# EAGLE board CT_schematic (EAGLE 7.6.0)

Size 100 x 80 mm. Coordinates in mm from the lower left corner, seen from the top.
Outline: 0,0 100,0 100,80 0,80 0,0
Copper layers (1*16): Top 0.035mm / dielectric 1.5mm / Bottom 0.035mm
Design rules "default": minimum track width 10mil, minimum drill 24mil, track to track 8mil, track to pad 8mil, pad to pad 8mil, via to via 8mil, smd to smd 8mil, copper to edge 40mil, drill to drill 8mil, minimum pad ring 10mil, minimum via ring 8mil, stop-mask expansion 4mil, vias tented up to drill 0mil, thermal gap 10mil

## Footprints (pad centres in the part's own frame; a part is rotated, then mirrored left to right if it is on the bottom)
C0603 = smd 0.8 x 0.8: 1 -0.762,0; 2 0.762,0
C0402 = smd 0.5 x 0.5: 1 -0.508,0; 2 0.508,0
C1210 = smd 1.2 x 2.5: 1 -1.524,0; 2 1.524,0
C0805 = smd 1.2 x 1.3: 1 -1.016,0; 2 1.016,0
C1206 = smd 1.3 x 1.6: 1 -1.524,0; 2 1.524,0
L0603 = smd 0.8 x 0.8: 1 -0.762,0; 2 0.762,0
DR1040 = smd 1.6 x 3.2: 1 -4.458,0; 2 4.458,0
R0603 = smd 0.8 x 0.8: 1 -0.762,0; 2 0.762,0
LQFP100 = smd 0.3 x 1.2: 1 -6,-7.75; 2 -5.5,-7.75; 3 -5,-7.75; 4 -4.5,-7.75; 5 -4,-7.75; 6 -3.5,-7.75; 7 -3,-7.75; 8 -2.5,-7.75; 9 -2,-7.75; 10 -1.5,-7.75; 11 -1,-7.75; 12 -0.5,-7.75; 13 0,-7.75; 14 0.5,-7.75; 15 1,-7.75; 16 1.5,-7.75; 17 2,-7.75; 18 2.5,-7.75; 19 3,-7.75; 20 3.5,-7.75; 21 4,-7.75; 22 4.5,-7.75; 23 5,-7.75; 24 5.5,-7.75; 25 6,-7.75; 51 6,7.75; 52 5.5,7.75; 53 5,7.75; 54 4.5,7.75; 55 4,7.75; 56 3.5,7.75; 57 3,7.75; 58 2.5,7.75; 59 2,7.75; 60 1.5,7.75; 61 1,7.75; 62 0.5,7.75; 63 0,7.75; 64 -0.5,7.75; 65 -1,7.75; 66 -1.5,7.75; 67 -2,7.75; 68 -2.5,7.75; 69 -3,7.75; 70 -3.5,7.75; 71 -4,7.75; 72 -4.5,7.75; 73 -5,7.75; 74 -5.5,7.75; 75 -6,7.75 | smd 1.2 x 0.3: 26 7.75,-6; 27 7.75,-5.5; 28 7.75,-5; 29 7.75,-4.5; 30 7.75,-4; 31 7.75,-3.5; 32 7.75,-3; 33 7.75,-2.5; 34 7.75,-2; 35 7.75,-1.5; 36 7.75,-1; 37 7.75,-0.5; 38 7.75,0; 39 7.75,0.5; 40 7.75,1; 41 7.75,1.5; 42 7.75,2; 43 7.75,2.5; 44 7.75,3; 45 7.75,3.5; 46 7.75,4; 47 7.75,4.5; 48 7.75,5; 49 7.75,5.5; 50 7.75,6; 76 -7.75,6; 77 -7.75,5.5; 78 -7.75,5; 79 -7.75,4.5; 80 -7.75,4; 81 -7.75,3.5; 82 -7.75,3; 83 -7.75,2.5; 84 -7.75,2; 85 -7.75,1.5; 86 -7.75,1; 87 -7.75,0.5; 88 -7.75,0; 89 -7.75,-0.5; 90 -7.75,-1; 91 -7.75,-1.5; 92 -7.75,-2; 93 -7.75,-2.5; 94 -7.75,-3; 95 -7.75,-3.5; 96 -7.75,-4; 97 -7.75,-4.5; 98 -7.75,-5; 99 -7.75,-5.5; 100 -7.75,-6
SAMTEC_FTSH-105-01-L-DV-K = smd 0.762 x 2.794: 1 -2.54,-2.032; 2 -2.54,2.032; 3 -1.27,-2.032; 4 -1.27,2.032; 5 0,-2.032; 6 0,2.032; 7 1.27,-2.032; 8 1.27,2.032; 9 2.54,-2.032; 10 2.54,2.032
TDFN-8/6MM = smd 0.3 x 0.75: 1 0,0; 2 0.5,0; 3 1,0; 4 1.5,0; 5 1.5,3; 6 1,3; 7 0.5,3; 8 0,3
FCI_10118193-0001LF = smd 0.4 x 1.35: 1 -1.3,2.675; 2 -0.65,2.675; 3 0,2.675; 4 0.65,2.675; 5 1.3,2.675 | smd 1.6 x 1.4: 6 -3.2,2.45; 7 3.2,2.45 | smd 1.9 x 1.9: 8 -1.2,0; 9 1.2,0 | hole 0.5: -3.3,0; 3.3,0
SOT143B = smd 1 x 0.7: 1 -0.75,-1 | smd 0.6 x 0.7: 2 0.95,-1; 3 0.95,1; 4 -0.95,1
QFN-28 = smd 0.813 x 0.305: 1 -2.451,1.5; 2 -2.451,1; 3 -2.451,0.5; 4 -2.451,0; 5 -2.451,-0.5; 6 -2.451,-1; 7 -2.451,-1.5; 15 2.451,-1.5; 16 2.451,-1; 17 2.451,-0.5; 18 2.451,0; 19 2.451,0.5; 20 2.451,1; 21 2.451,1.5 | smd 0.305 x 0.813: 8 -1.5,-2.451; 9 -1,-2.451; 10 -0.5,-2.451; 11 0,-2.451; 12 0.5,-2.451; 13 1,-2.451; 14 1.5,-2.451; 22 1.5,2.451; 23 1,2.451; 24 0.5,2.451; 25 0,2.451; 26 -0.5,2.451; 27 -1,2.451; 28 -1.5,2.451 | smd 3.607 x 3.607: 29 0,0
SJ-43515TS-SMT-TR = smd 2.2 x 3: 1 0.6,-7.4; 4 3.4,-7.4 | smd 3 x 3: 2 12.8,-7.4; 5 17,-3 | smd 2 x 3: 3 5.3,0; 6 2.5,0 | drill 1.8: P$7 4.5,-3.69; P$8 11.54,-3.69
ABS07-32.768KHZ-7-T = smd 1.1 x 2.4: 1 -2.5,0; 2 0,0
ABLS-25.000MHZ-B2F-T = smd 5.6 x 2.8: 1 -3.81,0; 2 5.69,0
ASFL1 = smd 1.7 x 1.5: 1 -1.27,-1.1; 2 1.27,-1.1; 3 1.27,1.1; 4 -1.27,1.1
TSOT-23-5 = smd 1.3 x 0.62: 1 -1.31,0.95; 2 -1.31,0; 3 -1.31,-0.95; 4 1.31,-0.95; 5 1.31,0.95
DFN8_2X3MC = smd 0.813 x 0.305: 1 -1.398,0.75; 2 -1.398,0.25; 3 -1.398,-0.25; 4 -1.398,-0.75; 5 1.398,-0.75; 6 1.398,-0.25; 7 1.398,0.25; 8 1.398,0.75 | smd 1.753 x 1.549: 9 0,0
JST-2-SMD = smd 1 x 4.6: 1 -1,-3.7; 2 1,-3.7 | smd 1.6 x 3.4: NC1 -3.4,1.5; NC2 3.4,1.5
SON-6 = smd 0.55 x 0.3: 1 -0.355,0.5 | smd 0.52 x 0.3: 2 -0.37,0; 3 -0.37,-0.5; 4 0.37,-0.5; 5 0.37,0; 6 0.37,0.5
SW_4-1437565-2 = smd 1.4 x 2.1: 1 -2.23,4.55; 2 -2.23,-4.55; 3 2.23,4.55; 4 2.23,-4.55
LGM67K-G1J2-24-Z = smd 0.8 x 1.4: A -2,0; C 0,0
NC7SZ125M5X = smd 1.3 x 0.7: 1 -1.3,0.95; 2 -1.3,0; 3 -1.3,-0.95; 4 1.3,-0.95; 5 1.3,0.95

## Placement (x,y rotation side)
C1  1e-07  [C0603]  -15.24,74.93 0 top  (outside the outline)
C2  1e-07  [C0603]  -19.05,74.93 0 top  (outside the outline)
C3  1e-07  [C0603]  -22.86,74.93 0 top  (outside the outline)
C4  1e-07  [C0603]  -26.67,74.93 0 top  (outside the outline)
C5  1e-07  [C0603]  -30.48,74.93 0 top  (outside the outline)
C6  4.7e-06  [C0603]  -74.93,69.85 0 top  (outside the outline)
C7  1e-07  [C0603]  -34.29,74.93 0 top  (outside the outline)
C8  1e-08  [C0603]  -38.1,74.93 0 top  (outside the outline)
C9  1e-06  [C0603]  -41.91,74.93 0 top  (outside the outline)
C10  1e-07  [C0603]  -45.72,74.93 0 top  (outside the outline)
C11  1e-11  [C0402]  -19.05,80.01 0 top  (outside the outline)
C12  1e-11  [C0402]  -22.86,80.01 0 top  (outside the outline)
C13  1e-11  [C0402]  -26.67,80.01 0 top  (outside the outline)
C14  1e-11  [C0402]  -30.48,80.01 0 top  (outside the outline)
C15  1e-07  [C0402]  -34.29,80.01 0 top  (outside the outline)
C16  1e-08  [C0402]  -38.1,80.01 0 top  (outside the outline)
C17  2.2e-05  [C1210]  -57.15,57.15 0 top  (outside the outline)
C18  2.2e-05  [C1210]  -63.5,57.15 0 top  (outside the outline)
C19  1e-09  [C0402]  -41.91,80.01 0 top  (outside the outline)
C20  1e-09  [C0402]  -45.72,80.01 0 top  (outside the outline)
C21  1e-07  [C0402]  -49.53,80.01 0 top  (outside the outline)
C22  1e-07  [C0402]  -53.34,80.01 0 top  (outside the outline)
C23  1e-07  [C0402]  -57.15,80.01 0 top  (outside the outline)
C24  1e-07  [C0402]  -60.96,80.01 0 top  (outside the outline)
C25  1e-07  [C0402]  -64.77,80.01 0 top  (outside the outline)
C26  1e-05  [C0805]  -27.94,63.5 0 top  (outside the outline)
C27  1e-05  [C0805]  -33.02,63.5 0 top  (outside the outline)
C28  1e-05  [C0805]  -38.1,63.5 0 top  (outside the outline)
C29  1e-05  [C0805]  -43.18,63.5 0 top  (outside the outline)
C30  1e-05  [C0805]  -48.26,63.5 0 top  (outside the outline)
C31  1e-08  [C0402]  -68.58,80.01 0 top  (outside the outline)
C32  1e-05  [C0805]  -53.34,63.5 0 top  (outside the outline)
C33  1e-05  [C0805]  -58.42,63.5 0 top  (outside the outline)
C34  1e-07  [C0402]  -72.39,80.01 0 top  (outside the outline)
C35  1e-05  [C1206]  -69.85,57.15 0 top  (outside the outline)
C36  1e-05  [C1206]  -76.2,57.15 0 top  (outside the outline)
C37  1e-08  [C0402]  -76.2,80.01 0 top  (outside the outline)
C38  1e-08  [C0402]  -15.24,85.09 0 top  (outside the outline)
F1  240.0  [L0603]  -49.53,74.93 0 top  (outside the outline)
I1  5.2e-06  [DR1040]  -38.1,36.83 0 top  (outside the outline)
R2  1000.0  [R0603]  -53.34,74.93 0 top  (outside the outline)
R4  4700.0  [R0603]  -57.15,74.93 0 top  (outside the outline)
R5  2200.0  [R0603]  -60.96,74.93 0 top  (outside the outline)
R6  2200.0  [R0603]  -64.77,74.93 0 top  (outside the outline)
R7  10000.0  [R0603]  -25.4,69.85 0 top  (outside the outline)
R8  10000.0  [R0603]  -30.48,69.85 0 top  (outside the outline)
R9  10000.0  [R0603]  -35.56,69.85 0 top  (outside the outline)
R10  10000.0  [R0603]  -40.64,69.85 0 top  (outside the outline)
R11  5.0  [R0603]  -68.58,74.93 0 top  (outside the outline)
R12  47000.0  [R0603]  -45.72,69.85 0 top  (outside the outline)
R13  47000.0  [R0603]  -50.8,69.85 0 top  (outside the outline)
R14  47000.0  [R0603]  -55.88,69.85 0 top  (outside the outline)
R15  680.0  [R0603]  -72.39,74.93 0 top  (outside the outline)
R16  220000.0  [R0603]  -76.2,63.5 0 top  (outside the outline)
R17  1000000.0  [R0603]  -71.12,63.5 0 top  (outside the outline)
R18  10000.0  [R0603]  -60.96,69.85 0 top  (outside the outline)
R19  10000.0  [R0603]  -66.04,69.85 0 top  (outside the outline)
R20  9100.0  [R0603]  -76.2,74.93 0 top  (outside the outline)
R21  680000.0  [R0603]  -15.24,69.85 0 top  (outside the outline)
R22  120000.0  [R0603]  -20.32,69.85 0 top  (outside the outline)
R23  2000.0  [R0603]  -15.24,80.01 0 top  (outside the outline)
R24  10000.0  [R0603]  -71.12,69.85 0 top  (outside the outline)
U1  STM32L073VZT3  [LQFP100]  -24.13,8.89 0 top  (outside the outline)
U2  FTSH-105-01-L-DV-K  [SAMTEC_FTSH-105-01-L-DV-K]  -55.88,7.62 0 top  (outside the outline)
U3  24AA01T-I/MNY  [TDFN-8/6MM]  -69.85,35.56 0 top  (outside the outline)
U4  10118193-0001LF  [FCI_10118193-0001LF]  -39.37,48.26 0 top  (outside the outline)
U5  prtr5v0u2ax  [SOT143B]  -27.94,85.09 0 top  (outside the outline)
U6  WM8731CLSEFL  [QFN-28]  -49.53,57.15 0 top  (outside the outline)
U7  SJ-43515TS-SMT-TR  [SJ-43515TS-SMT-TR]  -39.37,26.67 0 top  (outside the outline)
U8  SJ-43515TS-SMT-TR  [SJ-43515TS-SMT-TR]  -67.31,26.67 0 top  (outside the outline)
U9  ABS07-32.768KHZ-7-T  [ABS07-32.768KHZ-7-T]  -27.94,57.15 0 top  (outside the outline)
U10  ABLS-25.000MHZ-B2F-T  [ABLS-25.000MHZ-B2F-T]  -58.42,48.26 0 top  (outside the outline)
U11  ASFL1-12.288MHZ-EC-T  [ASFL1]  -30.48,48.26 0 top  (outside the outline)
U12  ltc3406es5  [TSOT-23-5]  -63.5,62.23 0 top  (outside the outline)
U13  MCP73831T-2ACI/MC  [DFN8_2X3MC]  -38.1,83.82 0 top  (outside the outline)
U14  S2B-PH-SM4-TB(LF)(SN)  [JST-2-SMD]  -53.34,38.1 0 top  (outside the outline)
U15  TPS3895ADRYR  [SON-6]  -31.75,83.82 0 top  (outside the outline)
U16  4-1437565-2  [SW_4-1437565-2]  -27.94,38.1 0 top  (outside the outline)
U17  Q65110A2395  [LGM67K-G1J2-24-Z]  -36.83,57.15 0 top  (outside the outline)
U18  nc7sz125m5x  [NC7SZ125M5X]  -15.24,63.5 0 top  (outside the outline)
U19  nc7sz125m5x  [NC7SZ125M5X]  -21.59,63.5 0 top  (outside the outline)

## Library data of the parts
C1-C38 F1 I1 R2 R4-R24 U1-U19 = circuit_tree

## Nets
CLK_CRYSTAL_U1_8: C11.1 U1.8 U9.1
CLK_CRYSTAL_U1_9: C12.1 U1.9 U9.2
CLK_CRYSTAL_U1_12: C13.1 U1.12 U10.1
CLK_CRYSTAL_U1_13: C14.1 U1.13 U10.2
CLK_U6_1: U6.1 U11.3
GND: C1.2 C2.2 C3.2 C4.2 C5.2 C6.2 C7.2 C8.2 C9.2 C10.2 C11.2 C12.2 C13.2 C14.2 C15.2 C16.2 C20.2 C21.2 C22.2 C23.2 C24.2 C25.2 C26.2 C27.2 C28.2 C29.2 C30.2 C31.2 C32.2 C33.1 C33.2 C34.2 C35.2 C36.2 C37.2 C38.2 R2.2 R7.2 R11.2 R12.2 R13.2 R14.2 R16.2 R20.2 R22.2 R23.2 U1.19 U1.20 U1.27 U1.49 U1.74 U1.99 U2.3 U2.5 U3.4 U3.7 U4.5 U4.6 U4.7 U4.8 U4.9 U5.1 U6.4 U6.15 U6.19 U6.25 U6.26 U6.29 U7.1 U8.1 U11.2 U12.2 U13.6 U13.9 U14.2 U15.2 U17.C U18.2 U18.3 U19.1 U19.3
INPUT_USBPOWER_5V: C35.1 R24.2 U4.1 U5.4 U13.1 U13.2
NET_U1_6: C7.1 U1.6
NET_U1_14: R4.1 U1.14 U19.4
NET_U1_22: C8.1 C9.1 F1.1 U1.21 U1.22
NET_U1_68: R5.1 U1.68 U3.6
NET_U1_69: R6.1 U1.69 U3.5
NET_U1_94: R7.1 U1.94
NET_U1_97: U17.A
NET_U1_98: U16.3 U16.4
NET_U2_9: R11.1 U2.9
NET_U6_9: U6.9
NET_U6_20: C25.1 C30.1 U6.20
NET_U7_2: C18.1 R13.1 U7.2
NET_U7_5: C17.1 R12.1 U7.5
NET_U7_13: C17.2
NET_U7_14: C18.2
NET_U8_5: C19.1 C20.1 R14.1 R15.1 U8.5
NET_U8_21: R15.2
NET_U8_22: C19.2
NET_U12_1: U12.1
NET_U12_3: I1.1 U12.3
NET_U12_5: R16.1 R17.1 U12.5
NET_U12_ATNET_3: I1.2 R17.2
NET_U13_5: R24.1 U13.5
NET_U13_8: R23.1 U13.8
NET_U15_1: R19.1 R20.1 U15.1
NET_U15_3: R21.2 R22.1 U15.3
NET_U15_4: R18.1 U15.4 U18.4 U19.2
NET_U16_1: R2.1 U16.1 U16.2
PROC_I2S2_CK: U1.52 U6.7
PROC_I2S2_SD: U1.18 U6.8
PROC_I2S2_WS: U1.51 U6.9 U6.11
PROC_SYS_SWCLK: R9.1 U1.76 U2.4
PROC_SYS_SWDIO: R10.1 U1.72 U2.2
PROC_USB_DM: U1.70 U4.2 U5.3
PROC_USB_DP: U1.71 U4.3 U5.2
RST_OUT_U2_JTAG_RST_B: R8.1 U2.10 U18.1
VCC_S1_3V7: C32.1 C36.1 U12.4 U13.3 U13.4 U14.1
VCC_TIER1_3V3: C1.1 C2.1 C3.1 C4.1 C5.1 C6.1 C10.1 C15.1 C16.1 C21.1 C22.1 C23.1 C24.1 C26.1 C27.1 C28.1 C29.1 C31.1 C33.2 C34.1 C37.1 C38.1 F1.2 I1.2 R4.2 R5.2 R6.2 R8.2 R9.2 R10.2 R17.2 R18.2 R19.2 R21.1 U1.28 U1.50 U1.73 U1.75 U1.100 U2.1 U3.8 U6.3 U6.5 U6.12 U6.18 U11.4 U15.6 U18.5 U19.5

## Tracks (layer width: path | path; a pad name or v marks a point on that pad's centre or on a via)
CLK_CRYSTAL_U1_8  (2 unrouted)
CLK_CRYSTAL_U1_9  (2 unrouted)
CLK_CRYSTAL_U1_12  (2 unrouted)
CLK_CRYSTAL_U1_13  (2 unrouted)
CLK_U6_1  (1 unrouted)
GND  (80 unrouted)
INPUT_USBPOWER_5V  (5 unrouted)
NET_U1_6  (1 unrouted)
NET_U1_14  (2 unrouted)
NET_U1_22  (4 unrouted)
NET_U1_68  (2 unrouted)
NET_U1_69  (2 unrouted)
NET_U1_94  (1 unrouted)
NET_U1_98  (1 unrouted)
NET_U2_9  (1 unrouted)
NET_U6_20  (2 unrouted)
NET_U7_2  (2 unrouted)
NET_U7_5  (2 unrouted)
NET_U8_5  (4 unrouted)
NET_U12_3  (1 unrouted)
NET_U12_5  (2 unrouted)
NET_U12_ATNET_3  (1 unrouted)
NET_U13_5  (1 unrouted)
NET_U13_8  (1 unrouted)
NET_U15_1  (2 unrouted)
NET_U15_3  (2 unrouted)
NET_U15_4  (3 unrouted)
NET_U16_1  (2 unrouted)
PROC_I2S2_CK  (1 unrouted)
PROC_I2S2_SD  (1 unrouted)
PROC_I2S2_WS  (2 unrouted)
PROC_SYS_SWCLK  (2 unrouted)
PROC_SYS_SWDIO  (2 unrouted)
PROC_USB_DM  (2 unrouted)
PROC_USB_DP  (2 unrouted)
RST_OUT_U2_JTAG_RST_B  (2 unrouted)
VCC_S1_3V7  (5 unrouted)
VCC_TIER1_3V3  (48 unrouted)